# EAGLE board PCB_2.1 (EAGLE 8.6.3)
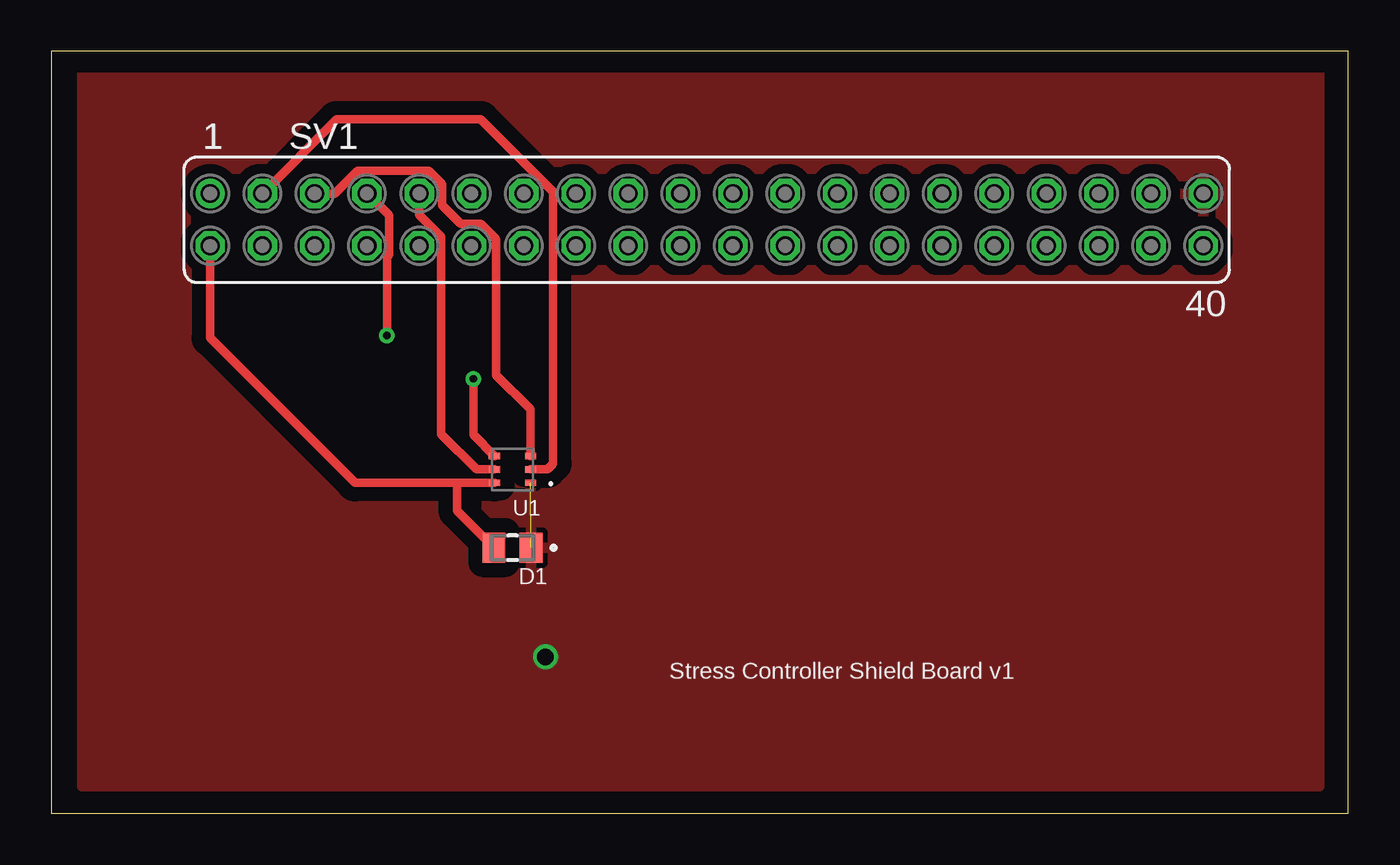
[diagram p0: board, top side]
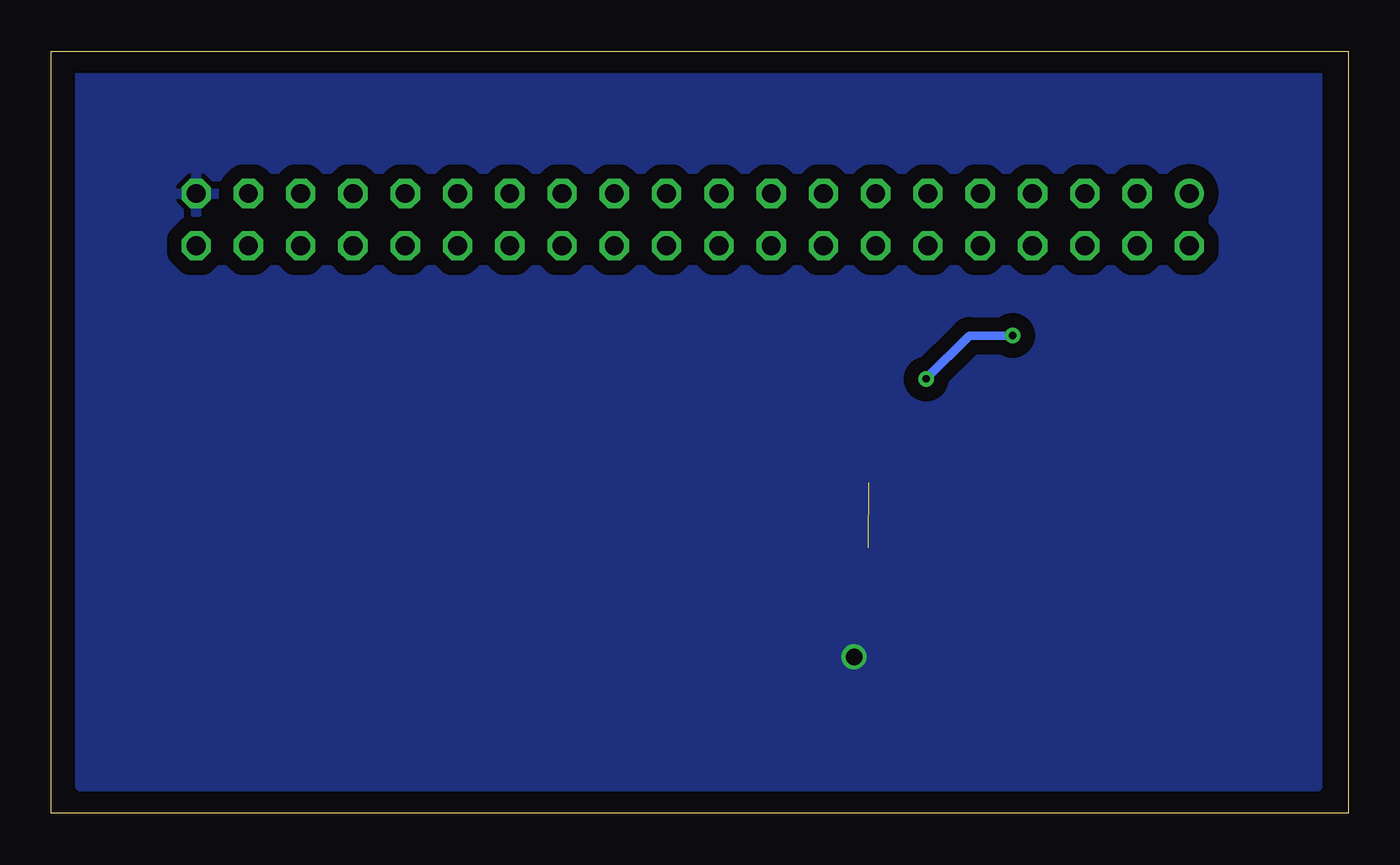
[diagram p1: board, bottom side, seen from below]

Size 63 x 37 mm. Coordinates in mm from the lower left corner, seen from the top.
Outline: 0,0 63,0 63,37 0,37 0,0
Copper layers (1*16): Top 0.035mm / dielectric 1.5mm / Bottom 0.035mm
Design rules "default *": minimum track width 6mil, minimum drill 0.35mm, track to track 0.7mm, track to pad 0.7mm, pad to pad 6mil, via to via 6mil, smd to smd 6mil, copper to edge 40mil, drill to drill 6mil, minimum pad ring 10mil, minimum via ring 8mil, stop-mask expansion 4mil, vias tented up to drill 0mil, thermal gap 10mil

## Footprints (pad centres in the part's own frame; a part is rotated, then mirrored left to right if it is on the bottom)
LEDC2012X120N = smd 1.1 x 1.45: A 0.9,0; C -0.9,0
FE20-2 = drill 0.914: 1 -24.13,1.27 | drill 0.914 octagon: 2 -24.13,-1.27; 3 -21.59,1.27; 4 -21.59,-1.27; 5 -19.05,1.27; 6 -19.05,-1.27; 7 -16.51,1.27; 8 -16.51,-1.27; 9 -13.97,1.27; 10 -13.97,-1.27; 11 -11.43,1.27; 12 -11.43,-1.27; 13 -8.89,1.27; 14 -8.89,-1.27; 15 -6.35,1.27; 16 -6.35,-1.27; 17 -3.81,1.27; 18 -3.81,-1.27; 19 -1.27,1.27; 20 -1.27,-1.27; 21 1.27,1.27; 22 1.27,-1.27; 23 3.81,1.27; 24 3.81,-1.27; 25 6.35,1.27; 26 6.35,-1.27; 27 8.89,1.27; 28 8.89,-1.27; 29 11.43,1.27; 30 11.43,-1.27; 31 13.97,1.27; 32 13.97,-1.27; 33 16.51,1.27; 34 16.51,-1.27; 35 19.05,1.27; 36 19.05,-1.27; 37 21.59,1.27; 38 21.59,-1.27; 39 24.13,1.27; 40 24.13,-1.27
VISHAY_VEML6030_2X2X0.87 = smd 0.55 x 0.3: 1 -0.875,0.65; 2 -0.875,0; 3 -0.875,-0.65; 4 0.875,-0.65; 5 0.875,0; 6 0.875,0.65

## Placement (x,y rotation side)
D1  SML-LX0805SIC-TR  [LEDC2012X120N]  22.4,12.9 180 top
SV1  [FE20-2]  31.84,28.83 0 top
U1  VEML6030-GS15  [VISHAY_VEML6030_2X2X0.87]  22.4,16.7 180 top

## Library data of the parts
D1 = SML-LX0805SIC-TR; AVAILABILITY: Unavailable; DESCRIPTION: Super Red 2 x 1.25 mm 0805 140° Water Clear 60 mcd 2 V PCB Surface Mount LED; MF: Lumex Opto/Components; MP: SML-LX0805SIC-TR; PACKAGE: 0805 Lumex; PRICE: None
SV1 = con-lsta; OC_FARNELL: unknown; OC_NEWARK: unknown
U1 = VEML6030-GS15; AVAILABILITY: Unavailable; DESCRIPTION: High Accuracy Ambient Light Sensor With I2c Interface; MF: Vishay Semiconductor; MP: VEML6030-GS15; PACKAGE: SMD-6 Vishay Semiconductor; PRICE: None

## Nets
GND: D1.C SV1.39 U1.1
N$2: SV1.3 U1.2
N$3: SV1.5 U1.3
N$4: SV1.9 U1.5
N$5: SV1.7 U1.4
VCCB: D1.A SV1.2 U1.6

## Tracks (layer width: path | path; a pad name or v marks a point on that pad's centre or on a via)
GND  (via drill 0.8)  (1 unrouted)
  other vias: 24,7.6
  pour Top: 1.5,36 1.5,1.3 61.6,1.3 61.6,36
  pour Bottom: 1.5,36 1.5,1.3 61.6,1.3 61.6,36
N$2
  Top 0.406: SV1.3 13.85,33.7 20.86,33.7 24.38,30.18 24.38,16.98 24.1,16.7 U1.2
N$3
  Top 0.406: U1.3 23.27,19.61 21.61,21.28 21.61,27.87 20.85,28.63 19.88,28.63 18.98,29.53 18.98,30.56 18.33,31.21 14.87,31.21 13.77,30.1 SV1.5
N$4
  Top 0.406: SV1.9 17.87,29.07 18.94,28 18.94,18.42 20.66,16.7 U1.5
N$5  (via drill 0.35)
  Top 0.406: U1.4 20.5,18.38 v20.5,21.1 | v16.3,23.2 16.3,27.02 16.4,27.12 16.4,29.03 SV1.7
  Bottom 0.406: v20.5,21.1 18.4,23.2 v16.3,23.2
VCCB
  Top 0.406: U1.6 19.7,16.05 | 19.7,16.05 14.75,16.05 7.71,23.09 SV1.2 | 19.7,16.05 19.7,14.7 D1.A

## Text on the board
tPlace: Stress Controller Shield Board v1